# Altium PCB Digital_Clock.PcbDoc
Units mm, origin at the board's own origin, x right, y up, seen from the top; angles counter-clockwise.
Board outline 76.65 x 48.13 mm, 2 copper layers (Top Layer, Bottom Layer), stack 1.581 mm thick; 20 components, 26 nets, 105 pads, 40 vias.
Unrouted connection lines stored in the file: 8.
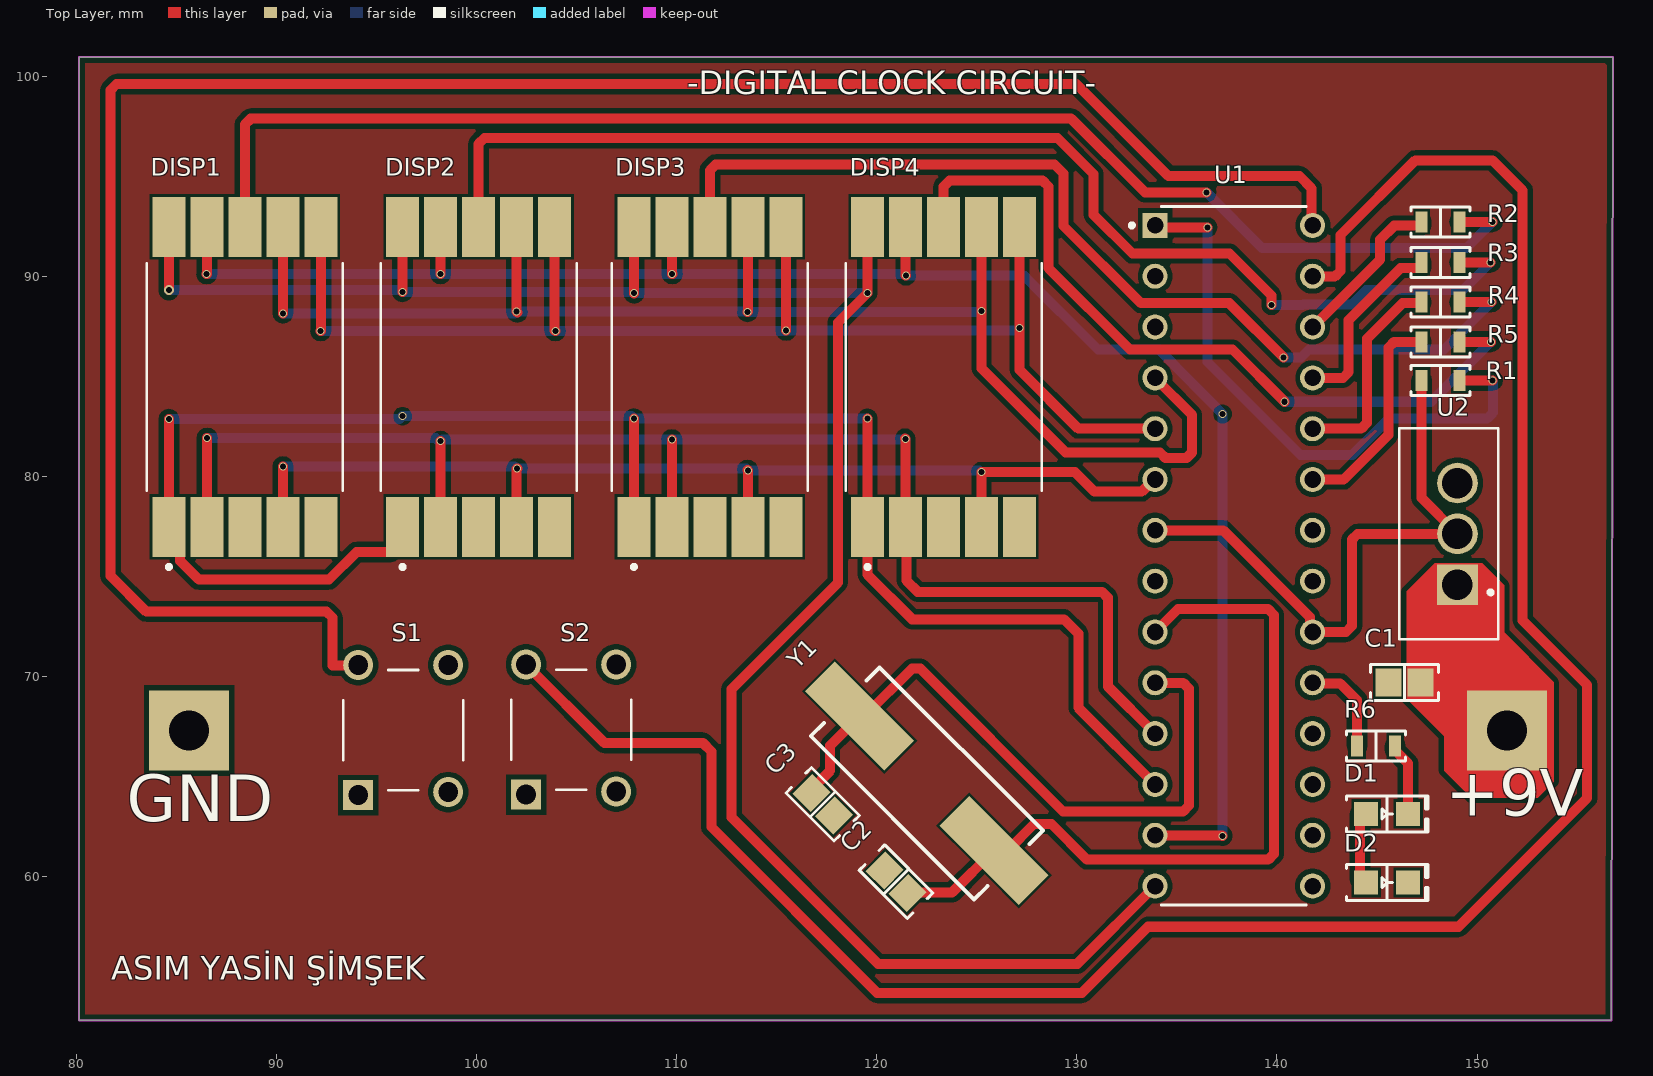
[diagram p0: Top Layer view]
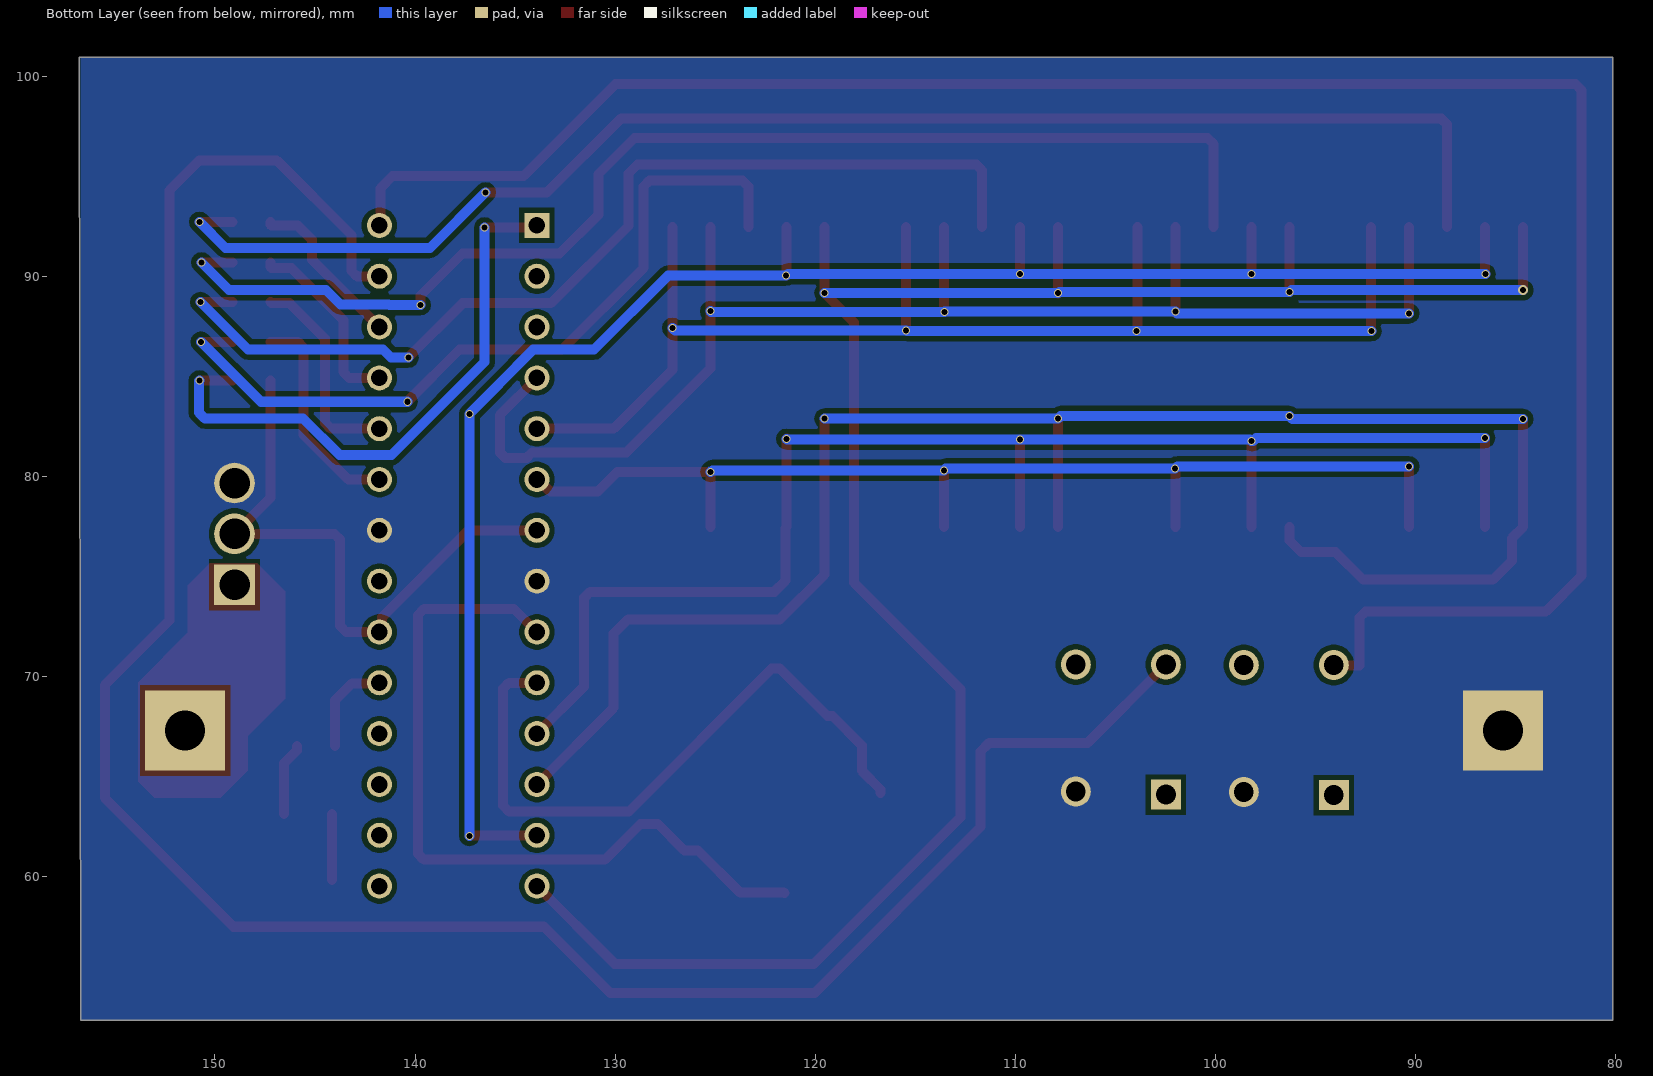
[diagram p1: Bottom Layer view, seen from below]
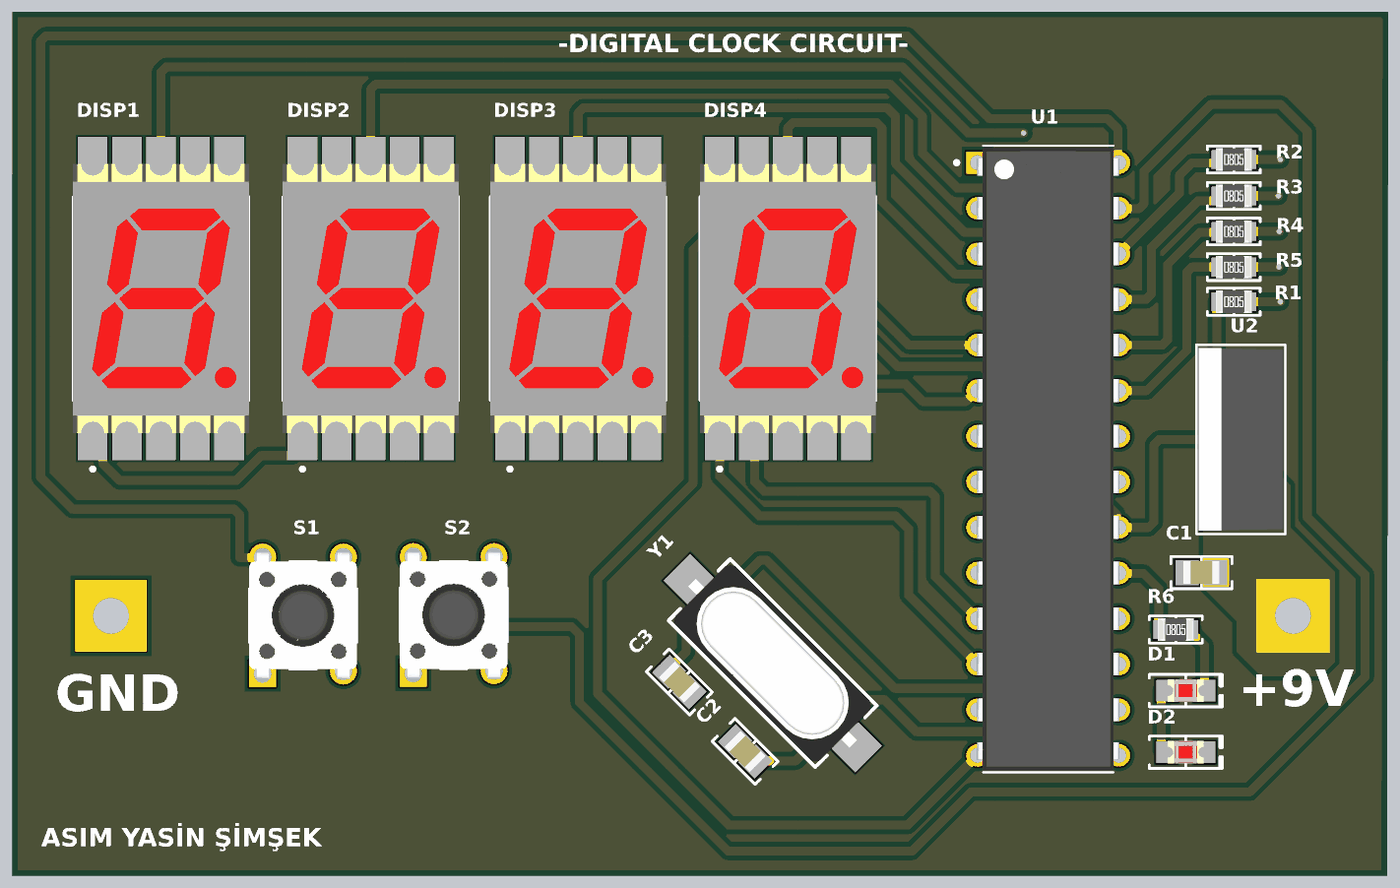
[diagram p2: 3D render of the assembled board from above, using the file's embedded part models]

## Layer stack, top to bottom
Top Solder: solder mask 0.0102, Solder Resist, Dk 3.5
Top Layer: signal copper 0.0356
Dielectric 1: dielectric 1.51, FR-4, Dk 4.8
Bottom Layer: signal copper 0.0356
Bottom Solder: solder mask 0.0102, Solder Resist, Dk 3.5

## Board outline
80.137,52.832 156.718,52.832 156.785,100.965 80.137,100.965

## Design rules (kind name [scope] priority, off if disabled: settings)
Clearance [All] p1: gap=0.254 ignorepadtopadclearanceinfootprint=FALSE except(0: Arc-Hole Track-Hole SMDPad-Hole THPad-Hole Via-Hole Fill-Hole Poly-Hole Region-Hole Text-Hole; 0.127: SMDPad-SMDPad SMDPad-THPad SMDPad-Via SMDPad-Fill SMDPad-Poly SMDPad-Region SMDPad-Text)
PlaneConnect [All] p1: planeconnectstyle=Direct reliefexpansion=0.508 reliefentries=4 reliefconductorwidth=0.254 reliefairgap=0.254
PolygonConnect [All] p1: connectstyle=Direct reliefconductorwidth=0.254 reliefentries=4 polygonreliefangle="90 Angle" airgapwidth=0.254
RoutingVias [All] p1: holewidth=0.711 width=1.27 viastyle="Through Hole" minholewidth=0.711 minwidth=1.27 maxholewidth=0.711 maxwidth=1.27
SolderMaskExpansion [All] p1: expansion=0.102 istentingtop=FALSE
Width [All] p1: maxlimit=3 minlimit=0.152 preferedwidth=0.5
29 further rules are at their usual default settings.

## Components (designator, comment, footprint, x,y, rotation, side; value= is the part's Value field where it differs from the comment)
C1 "100pF" "CAP 0805_2012" 146.38,69.723 r0 top
C2 "22pF" "CAP 0805_2012" 120.962,59.759 r135 top
C3 "22pF" "CAP 0805_2012" 117.297,63.627 r135 top
D1 "Red" "LED 0805_2012 RED" 145.508,63.144 r0 top
D2 "Red" "LED 0805_2012 RED" 145.508,59.715 r0 top
DISP1 "7 Segment Display" "7 Segment Display" 88.417,84.988 r90 top
DISP2 "7 Segment Display" "7 Segment Display" 100.101,84.988 r90 top
DISP3 "7 Segment Display" "7 Segment Display" 111.658,84.988 r90 top
DISP4 "7 Segment Display" "7 Segment Display" 123.342,84.988 r90 top
R1 "10 kOhms" "YAGEO RES RK73 RS73 SG73 0805_2012" 148.184,84.811 r0 top
R2 "330 Ohms" "YAGEO RES RK73 RS73 SG73 0805_2012" 148.184,92.735 r0 top
R3 "330 Ohms" "YAGEO RES RK73 RS73 SG73 0805_2012" 148.184,90.703 r0 top
R4 "330 Ohms" "YAGEO RES RK73 RS73 SG73 0805_2012" 148.184,88.722 r0 top
R5 "330 Ohms" "YAGEO RES RK73 RS73 SG73 0805_2012" 148.184,86.741 r0 top
R6 "330 Ohms" "YAGEO RES RK73 RS73 SG73 0805_2012" 144.951,66.548 r0 top
S1 "Push_Button" Push_Button 96.332,67.337 r90 top
S2 "Push_Button" Push_Button 104.724,67.361 r90 top
U1 "ATMEGA328-PU" ATMEGA328-PU 137.846,76.048 r0 top
U2 "LM7805" LM7805CT 149.022,77.14 r90 top
Y1 "16MHz" "ABRACON ABLS" 122.498,64.674 r315 top

## Footprints (in the part's own frame and the unit in brackets; to place one, negate y for a bottom-side part, rotate by r counter-clockwise, add the part's x,y. Pads: shape width x height; smd on the part's side, far side on the other; paste and mask are expansions set on the pad)
"7 Segment Display" [mm]
  rect 3x1.65 smd mask+0.05: 1(-7.5,3.8) 2(-7.5,1.9) 3(-7.5,0) 4(-7.5,-1.9) 5(-7.5,-3.8) 6(7.5,-3.8) 7(7.5,-1.9) 8(7.5,0) 9(7.5,1.9) 10(7.5,3.8)
  silkscreen extent -9.6,-4.9 5.68,4.9, body extent -7.5,-4.9 7.5,4.9, height 3.75
"ABRACON ABLS" [mm] "Crystal, 2-Leads, Body 4.70x11.40mm, Pitch 8.80mm, IPC Medium Density"
  rect 5.6x2.1 smd: 1(-4.75,0) 2(4.75,0)
  silkscreen extent -5.77,-2.43 5.77,2.43, body extent -6.35,-2.35 6.35,2.35, height 4.2
ATMEGA328-PU [mm]
  rect 1.25x1.25 / inner round 1.25 / far side rect 1.25x1.25 hole 0.83: 1(-3.937,16.51)
  round 1.25 hole 0.83: 2(-3.937,13.97) 3(-3.937,11.43) 4(-3.937,8.89) 5(-3.937,6.35) 6(-3.937,3.81) 7(-3.937,1.27) 8(-3.937,-1.27) 9(-3.937,-3.81) 10(-3.937,-6.35) 11(-3.937,-8.89) 12(-3.937,-11.43) 13(-3.937,-13.97) 14(-3.937,-16.51) 15(3.937,-16.51) 16(3.937,-13.97) 17(3.937,-11.43) 18(3.937,-8.89) 19(3.937,-6.35) 20(3.937,-3.81) 21(3.937,-1.27) 22(3.937,1.27) 23(3.937,3.81) 24(3.937,6.35) 25(3.937,8.89) 26(3.937,11.43) 27(3.937,13.97) 28(3.937,16.51)
  silkscreen extent -5.2,-17.45 3.62,17.45, body extent -3.95,-17.34 3.95,17.34, height 4.57
"CAP 0805_2012" [mm] "Chip Capacitor, 2-Leads, Body 2.00x1.20mm, IPC Medium Density"
  rect 1.3x1.4 smd: 1(-0.8,0) 2(0.8,0)
  silkscreen extent -1.7,-0.9 1.7,0.9, body extent -1,-0.64 1,0.64, height 1.26
"LED 0805_2012 RED" [mm] "Chip Diode, 2-Leads, Body 2.00x1.25mm, IPC Medium Density"
  rect 1.2x1.2 smd: 1(-1.05,0) 2(1.05,0)
  silkscreen extent -2.03,-0.9 2.03,0.9, body extent -1,-0.62 1,0.63, height 0.9
LM7805CT [mil]
  rect 80x80 hole 60: 1(-100,0)
  round 80 hole 60: 2(0,0) 3(100,0)
  silkscreen extent -207,-80 207,115, body extent -200,-75 200,110, height 610
Push_Button [mm]
  rect 1.498x1.498 / inner round 1.498 / far side rect 1.498x1.498 hole 0.99: 1(-3.25,2.25)
  round 1.498 hole 0.99: 2(3.25,2.25) 3(-3.1,-2.25) 4(3.25,-2.25)
  silkscreen extent -3,-3 3,3, body extent -3.9,-3 3.9,3, height 17.01
"YAGEO RES RK73 RS73 SG73 0805_2012" [mm] "Chip Resistor, 2-Leads, Body 2.00x1.25mm"
  rect 0.6x1.05 smd: 1(-0.95,0) 2(0.95,0)
  silkscreen extent -1.48,-0.75 1.48,0.75, body extent -1,-0.62 1,0.63, height 0.6

## Part data
C1: library part 08053A101J4T2A, "CAP CER 100PF 25V NP0 0805", Device Package="0805 (2012 Metric)", manufacturer="AVX Corporation", Operating Temperature="-55°C ~ 125°C", Ratings=AEC-Q200, Supplier Part Number 1=478-08053A101J4T2ACT-ND, Temperature Coefficient="C0G, NP0", Tolerance=±5%, Voltage - Rated=25V, Applications=Automotive, Capacitance=100pF, componentlink1description=Datasheet, componentlink1url=http://datasheets.avx.com/AutoMLCC.pdf, componentlink2description="DigiKey Link", componentlink2url=http://digikey.com/product-detail/en/avx-corporation/08053A101J4T2A/478-08053A101J4T2ACT-ND/11570400, lastupdated="2.09.2020 01:04:04", Lifecycle Status=Active, Minimum Order=1, Mounting Type="Surface Mount, MLCC", Package / Case="0805 (2012 Metric)", packaging=TapeAndReel, Part Number=08053A101J4T2A, Part Status=Active, partid=27788, price=0.03, series=-, Supplier 1=DigiKey
C2 C3: library part 08055C220JAT2A, "CAP CER 22PF 50V X7R 0805", Device Package="0805 (2012 Metric)", manufacturer="AVX Corporation", Operating Temperature="-55°C ~ 125°C", Supplier Part Number 1=478-08055C220JAT2ACT-ND, Temperature Coefficient=X7R, Tolerance=±5%, Voltage - Rated=50V, Applications="General Purpose", Capacitance=22pF, componentlink1description=Datasheet, componentlink1url=http://datasheets.avx.com/X7RDielectric.pdf, componentlink2description="DigiKey Link", componentlink2url=http://digikey.com/product-detail/en/avx-corporation/08055C220JAT2A/478-08055C220JAT2ACT-ND/11570372, lastupdated="2.09.2020 01:04:04", Lifecycle Status=Active, Minimum Order=1, Mounting Type="Surface Mount, MLCC", Package / Case="0805 (2012 Metric)", packaging=TapeAndReel, Part Number=08055C220JAT2A, Part Status=Active, partid=27776, price=0.05, series=-, Supplier 1=DigiKey
D1 D2: library part XZCM2CRK54WA-1VF, "LED RED CLEAR 0805 SMD", Current - Test=2mA, Device Package="0805 (2012 Metric)", Lens Color=Colorless, manufacturer=SunLED, Millicandela Rating=98mcd, Supplier Device Package=0805, Supplier Part Number 1=1497-XZCM2CRK54WA-1VFCT-ND, Voltage - Forward (Vf) (Typ)=1.8V, Color=Red, componentlink1description=Datasheet, componentlink1url=https://www.sunledusa.com/products/spec/XZCM2CRK54WA-1VF.pdf, componentlink2description="DigiKey Link", componentlink2url=https://www.digikey.com/en/products/detail/sunled/XZCM2CRK54WA-1VF/15761904, Height (Max)=0.85mm, lastupdated="3.06.2024 20:00:05", Lens Size="1.30mm x 1.25mm", Lens Style="Rectangle with Flat Top", Lens Transparency=Clear, Lifecycle Status=Active, Minimum Order=1, Mounting Type="Surface Mount", Package / Case="0805 (2012 Metric)", packaging=TapeAndReel, Part Number=XZCM2CRK54WA-1VF, Part Status=Active, partid=1021, price=0.12, series=-, Size / Dimension="2.00mm L x 1.25mm W", Supplier 1=DigiKey, Viewing Angle=140°, Wavelength - Dominant=625nm, Wavelength - Peak=640nm
R1: library part SG73P2ATTD1002F, "RES 10K OHM 1% 1/2W 0805", Device Package="0805 (2012 Metric)", manufacturer="KOA Speer Electronics, Inc.", Operating Temperature="-55°C ~ 155°C", Power (Watts)="0.5W, 1/2W", Ratings=AEC-Q200, Supplier Device Package=0805, Supplier Part Number 1=2019-SG73P2ATTD1002FCT-ND, Temperature Coefficient=±100ppm/°C, Tolerance=±1%, componentlink1description=Datasheet, componentlink1url=https://www.koaspeer.com/pdfs/SG73P.pdf, componentlink2description="DigiKey Link", componentlink2url=https://www.digikey.com/en/products/detail/koa-speer-electronics-inc/SG73P2ATTD1002F/10188413, Composition="Thick Film", Features="Automotive AEC-Q200, Pulse Withstanding", Height - Seated (Max)="0.024\" (0.60mm)", lastupdated="25.07.2024 09:45:15", Lifecycle Status=Active, Minimum Order=1, Number of Terminations=2, Package / Case="0805 (2012 Metric)", packaging=TapeAndReel, Part Number=SG73P2ATTD1002F, Part Status=Active, partid=60912, price=0.02, Resistance="10 kOhms", series=SG73P, Size / Dimension="0.079\" L x 0.049\" W (2.00mm x 1.25mm)", Supplier 1=DigiKey
R2 R3 R4 R5 R6: library part SG73P2ATTD3300F, "RES 330 OHM 1% 1/2W 0805", Device Package="0805 (2012 Metric)", manufacturer="KOA Speer Electronics, Inc.", Operating Temperature="-55°C ~ 155°C", Power (Watts)="0.5W, 1/2W", Ratings=AEC-Q200, Supplier Device Package=0805, Supplier Part Number 1=2019-SG73P2ATTD3300FCT-ND, Temperature Coefficient=±100ppm/°C, Tolerance=±1%, componentlink1description=Datasheet, componentlink1url=https://www.koaspeer.com/pdfs/SG73P.pdf, componentlink2description="DigiKey Link", componentlink2url=https://www.digikey.com/en/products/detail/koa-speer-electronics-inc/SG73P2ATTD3300F/10188071, Composition="Thick Film", Features="Automotive AEC-Q200, Pulse Withstanding", Height - Seated (Max)="0.024\" (0.60mm)", lastupdated="25.07.2024 09:45:15", Lifecycle Status=Active, Minimum Order=1, Number of Terminations=2, Package / Case="0805 (2012 Metric)", packaging=TapeAndReel, Part Number=SG73P2ATTD3300F, Part Status=Active, partid=60891, price=0.02, Resistance="330 Ohms", series=SG73P, Size / Dimension="0.079\" L x 0.049\" W (2.00mm x 1.25mm)", Supplier 1=DigiKey
Y1: library part ABLS-16.000MHZ-20-D4H-T, "CRYSTAL 16.0000MHZ 20PF SMD", ESR (Equivalent Series Resistance)="40 Ohms", Frequency Stability=±35ppm, Frequency Tolerance=±30ppm, Load Capacitance=20pF, manufacturer="Abracon LLC", Operating Mode=Fundamental, Operating Temperature="-40°C ~ 85°C", Package / Case=HC-49/US, Supplier Part Number 1=535-14857-1-ND, componentlink1description=Datasheet, componentlink1url=https://abracon.com/Resonators/abls.pdf, componentlink2description="DigiKey Link", componentlink2url=http://digikey.com/product-detail/en/abracon-llc/ABLS-16.000MHZ-20-D4H-T/535-14857-1-ND/9997934, Frequency=16MHz, Height - Seated (Max)="0.165\" (4.20mm)", lastupdated="3.06.2024 20:02:00", Lifecycle Status=Active, Minimum Order=0, Mounting Type="Surface Mount", packaging=TapeAndReel, Part Number=ABLS-16.000MHZ-20-D4H-T, Part Status=Active, partid=171, price=0.39, series=ABLS, Size / Dimension="0.449\" L x 0.185\" W (11.40mm x 4.70mm)", Supplier 1=DigiKey, Type="MHz Crystal"

## Free pads (board coordinates)
  rect 4x4 hole 2 mask+0.05: GND(85.634,67.31) VCC(151.486,67.31)

## Via types
v1: diameter 0.4, hole 0.3, Top Layer to Bottom Layer, tented both sides, 39 vias
v2: diameter 0.5, hole 0.3, Top Layer to Bottom Layer, tented both sides, 1 vias

## Nets (pads, with @x,y where several pads share a name; then routed paths per layer and width w, separated by ;. In a path a pad name is that pad's centre, name@x,y a point inside that pad or via, vN(x,y) a via of type N, cw(c..) or ccw(c..) an arc to the next point about the centre after c; other vN are vias at no path point)
A: DISP1.7 DISP2.7 DISP3.7 DISP4.7 U1.4 | length 71.9
  Top Layer w0.5: DISP1.7 90.317,88.168 v1(90.322,88.163) ; DISP2.7 v1(102.001,88.245) v1@102.032,88.214 ; v1(113.538,88.24) 113.558,88.26 DISP3.7 ; DISP4.7 v1(125.242,88.27) 125.242,85.4 129.438,81.204 134.159,81.204 134.439,80.924 135.47,80.924 135.763,81.217 135.763,83.083 U1.4
  Bottom Layer w0.5: v1(90.322,88.163) 101.92,88.163 v1(102.001,88.245) 113.533,88.245 v1(113.538,88.24) 125.212,88.24 v1(125.242,88.27)
B: DISP1.6 DISP2.6 DISP3.6 DISP4.6 U1.5 | length 65.8
  Top Layer w0.5: v1(92.202,87.274) 92.217,87.29 DISP1.6 ; DISP2.6 103.901,87.31 v1(103.937,87.274) ; DISP3.6 v1(115.458,87.31) v1@115.468,87.3 ; DISP4.6 v1(127.142,87.437) 127.142,85.329 130.073,82.398 U1.5
  Bottom Layer w0.5: v1(92.202,87.274) v1(103.937,87.274) 115.423,87.274 v1(115.458,87.31) 127.015,87.31 v1(127.142,87.437)
C: DISP1.4 DISP2.4 DISP3.4 DISP4.4 U1.6 | length 56
  Top Layer w0.5: DISP1.4 90.317,80.513 v1(90.322,80.518) ; DISP2.4 102.001,80.386 v1(102.017,80.401) v1@102.032,80.416 ; v1@113.538,80.34 v1(113.558,80.32) DISP3.4 ; DISP4.4 125.242,80.218 v1(125.222,80.239) 129.896,80.239 130.886,79.248 133.241,79.248 133.851,79.858 U1.6
  Bottom Layer w0.5: v1(90.322,80.518) 101.9,80.518 v1(102.017,80.401) 113.477,80.401 v1(113.558,80.32) 125.141,80.32 v1(125.222,80.239)
D: DISP1.2 DISP2.2 DISP3.2 DISP4.2 U1.11 | length 73.5
  Top Layer w0.5: DISP1.2 86.517,81.92 v1(86.538,81.94) ; v1@98.196,81.788 v1(98.201,81.783) DISP2.2 ; v1(109.753,81.864) 109.758,81.859 DISP3.2 ; v1@121.412,81.915 v1(121.442,81.885) DISP4.2 121.488,77.443 121.488,74.803 122.047,74.244 131.254,74.244 131.547,73.951 131.547,69.52 U1.11
  Bottom Layer w0.5: v1(86.538,81.94) 86.549,81.929 97.963,81.929 98.109,81.783 v1(98.201,81.783) 98.272,81.853 109.742,81.853 v1(109.753,81.864) 121.422,81.864 v1(121.442,81.885)
E: DISP1.1 DISP2.1 DISP3.1 DISP4.1 U1.12 | length 89.4
  Top Layer w0.5: v1(84.617,82.87) DISP1.1 85.188,76.917 85.188,75.78 86.114,74.854 92.621,74.854 94.005,76.238 95.726,76.238 96.301,76.813 DISP2.1 ; DISP3.1 v1(107.858,82.906) ; v1(119.532,82.906) 119.542,82.896 DISP4.1 119.542,75.098 121.768,72.873 129.362,72.873 130.073,72.161 130.073,68.453 U1.12
  Bottom Layer w0.5: v1(84.617,82.87) 96.149,82.87 v1(96.301,83.023) 107.741,83.023 v1(107.858,82.906) v1(119.532,82.906)
F: DISP1.9 DISP2.9 DISP3.9 DISP4.9 U1.13 | length 87.7
  Top Layer w0.5: v1(86.512,90.119) 86.517,90.124 DISP1.9 ; v1(98.196,90.119) 98.201,90.124 DISP2.9 ; DISP3.9 v1(109.758,90.14) v1@109.779,90.119 ; DISP4.9 121.442,90.063 v1(121.463,90.043) ; U1.13 137.262,62.078 v1(137.287,62.052)
  Bottom Layer w0.5: v1(86.512,90.119) v1(98.196,90.119) 109.738,90.119 v1(109.758,90.14) 121.366,90.14 v1(121.463,90.043) 127.356,90.043 131.05,86.349 134.094,86.349 135.832,84.611 135.832,84.589 v1(137.287,83.134) v1(137.287,62.052)
G: DISP1.10 DISP2.10 DISP3.10 DISP4.10 U1.14 | length 102.9
  Top Layer w0.5: v2(84.617,89.322) DISP1.10 ; v1(96.291,89.23) 96.301,89.24 DISP2.10 ; DISP3.10 v1(107.858,89.169) v1@107.874,89.154 ; DISP4.10 119.542,89.189 v1(119.532,89.179) 118.059,87.706 118.059,74.701 112.751,69.393 112.751,62.967 120.066,55.651 130.023,55.651 U1.14
  Bottom Layer w0.5: v2(84.617,89.322) 96.2,89.322 v1(96.291,89.23) 107.798,89.23 v1(107.858,89.169) 119.522,89.169 v1(119.532,89.179)
GND: C1.1 C2.2 C3.1 D2.2 pad.GND S1.3 S2.3 U1.8 U1.22 U2.3
NetC2_1: C2.1 U1.9 Y1.2 | length 39.1
  Top Layer w0.5: C2.1 121.563,59.229 123.77,59.229 Y1.2 126.543,61.316 127.864,62.636 128.727,62.636 130.505,60.858 139.56,60.858 139.852,61.151 139.852,73.088 139.56,73.381 135.052,73.381 U1.9
NetC3_2: C3.2 U1.10 Y1.1 | length 33
  Top Layer w0.5: C3.2 116.732,64.366 117.67,65.304 117.67,66.564 Y1.1 119.392,68.033 121.764,70.405 122.178,70.405 129.311,63.271 135.312,63.271 135.605,63.564 135.605,69.405 135.312,69.698 U1.10
NetD1_1: D1.1 D2.1 | length 3.3
  Top Layer w0.5: D2.1@144.153,59.842 D1.1@144.153,63.144
NetD1_2: D1.2 R6.2 | length 3.7
  Top Layer w0.5: R6.2 145.901,66.323 146.558,65.666 D1.2
NetR1_2: R1.2 U1.1 | length 29.7
  Top Layer w0.5: U1.1 134.01,92.456 v1(136.525,92.456) ; R1.2 v1(150.774,84.811)
  Bottom Layer w0.5: v1(136.525,92.456) 136.525,85.725 141.173,81.077 143.764,81.077 145.593,82.906 150.507,82.906 150.8,83.198 150.8,84.785 v1(150.774,84.811)
NetR2_1: R2.1 U1.26 | length 8.3
  Top Layer w0.5: U1.26 145.161,90.856 145.161,91.846 145.859,92.544 147.184,92.544 147.234,92.594 R2.1
NetR3_1: R3.1 U1.25 | length 9.5
  Top Layer w0.5: U1.25 143.293,84.938 143.586,85.23 143.586,87.833 146.181,90.428 147.184,90.428 147.234,90.478 R3.1
NetR4_1: R4.1 U1.24 | length 10.5
  Top Layer w0.5: U1.24 144.208,82.398 144.501,82.69 144.501,86.893 146.279,88.671 R4.1@147.184,88.671 ; R4.1@147.184,88.672 R4.1
NetR5_1: R5.1 U1.23 | length 10.9
  Top Layer w0.5: U1.23 143.332,79.858 145.567,82.093 145.567,86.448 145.86,86.741 R5.1
NetR6_1: R6.1 U1.19 | length 4.9
  Top Layer w0.5: U1.19 141.812,69.669 143.158,69.669 144.001,68.826 R6.1
NetS1_2: S1.2 U1.28 | length 104.1
  Top Layer w0.5: S1.2 94.055,70.56 92.797,70.56 92.797,72.961 92.504,73.254 83.49,73.254 81.712,75.032 81.712,99.326 82.005,99.619 129.972,99.619 134.569,95.021 141.122,95.021 141.732,94.412 141.732,92.608 U1.28
NetS2_2: S2.2 U1.27 | length 112.4
  Top Layer w0.5: S2.2 106.385,66.7 111.303,66.7 111.735,66.269 111.735,62.484 120.015,54.204 130.251,54.204 133.553,57.506 149.073,57.506 155.499,63.932 155.499,69.596 152.273,72.822 152.273,94.31 150.774,95.809 146.914,95.809 143.18,92.075 143.18,90.285 142.887,89.992 141.808,89.992 U1.27
Reg-Out: R1.1 U1.7 U1.20 U2.2 | length 30.5
  Top Layer w0.5: U1.7 137.312,77.318 141.639,72.991 141.639,72.381 U1.20 143.446,72.238 143.739,72.53 143.739,76.847 144.031,77.14 U2.2 147.234,78.928 R1.1
VCC: C1.2 pad.VCC U2.1
W: DISP4.8 R5.2 | length 39.3
  Top Layer w0.5: DISP4.8 123.342,94.5 123.635,94.793 128.29,94.793 128.583,94.5 128.583,90.416 132.65,86.349 137.781,86.349 v1(140.386,83.744) ; R5.2 v1(150.698,86.741)
  Bottom Layer w0.5: v1(140.386,83.744) 147.701,83.744 v1(150.698,86.741)
X: DISP1.8 R2.2 | length 72.4
  Top Layer w0.5: DISP1.8 88.417,97.599 88.71,97.892 129.718,97.892 133.401,94.209 v1(136.474,94.209) ; R2.2 v1(150.774,92.735)
  Bottom Layer w0.5: v1(136.474,94.209) 139.254,91.429 149.468,91.429 v1(150.774,92.735)
Y: DISP2.8 R3.2 | length 62.2
  Top Layer w0.5: DISP2.8 100.101,96.634 100.394,96.926 129.032,96.926 130.835,95.123 130.835,93.084 132.773,91.147 137.631,91.147 139.725,89.052 v1(139.725,88.57) ; R3.2 v1(150.673,90.703)
  Bottom Layer w0.5: v1(139.725,88.57) 141.278,88.57 141.315,88.607 143.722,88.607 144.447,89.332 149.301,89.332 v1(150.673,90.703)
Z: DISP3.8 R4.2 | length 50.3
  Top Layer w0.5: DISP3.8 111.658,95.313 111.951,95.606 128.88,95.606 129.337,95.148 129.337,92.532 133.198,88.671 137.617,88.671 v1(140.335,85.954) ; R4.2 v1(150.724,88.722)
  Bottom Layer w0.5: v1(140.335,85.954) 141.202,85.954 141.597,86.349 148.35,86.349 v1(150.724,88.722)
pads on no net: DISP1.3 DISP1.5 DISP2.3 DISP2.5 DISP3.3 DISP3.5 DISP4.3 DISP4.5 S1.1 S1.4 S2.1 S2.4 U1.2 U1.3 U1.15 U1.16 U1.17 U1.18 U1.21

## Polygon pours and split planes (outlines as drawn)
GND on Bottom Layer "GND_L02_P000" (solid, pour order 0): 80.137,100.965 156.785,100.965 156.718,100.897 156.718,52.832 80.137,52.832
no net on Top Layer "NONET_L01_P001" (solid, pour order 1): 80.137,100.965 156.785,100.965 156.718,100.897 156.718,52.832 80.137,52.832

## Keep-outs
Top Layer:
  the board outline again, w0.1

## Other copper
Top Layer:
  region net VCC: 147.701,75.489 147.887,75.675 150.258,75.675 151.35,74.583 151.35,72.212 153.825,69.737 153.825,64.75 153.025,63.95 149.7,63.95 148.35,65.3 148.35,67.025 146.475,68.9 146.475,74.263

## Silkscreen, mask and mechanical layers (free items; w line width, h text height)
Top Overlay:
  text "-DIGITAL CLOCK CIRCUIT-" at 110.525,98.718 h2
  text "+9V" at 148.425,62.285 h4
  text "GND" at 82.525,62.01 h4
  text "ASIM YASİN ŞİMŞEK" at 81.748,54.468 h2